# Altium PCB powermeter_Power.PcbDoc
Units mm, origin at the board's own origin, x right, y up, seen from the top; angles counter-clockwise.
Board outline 32.01 x 52.21 mm, 2 copper layers (Top Layer, Bottom Layer); 46 components, 25 nets, 122 pads, 25 vias.
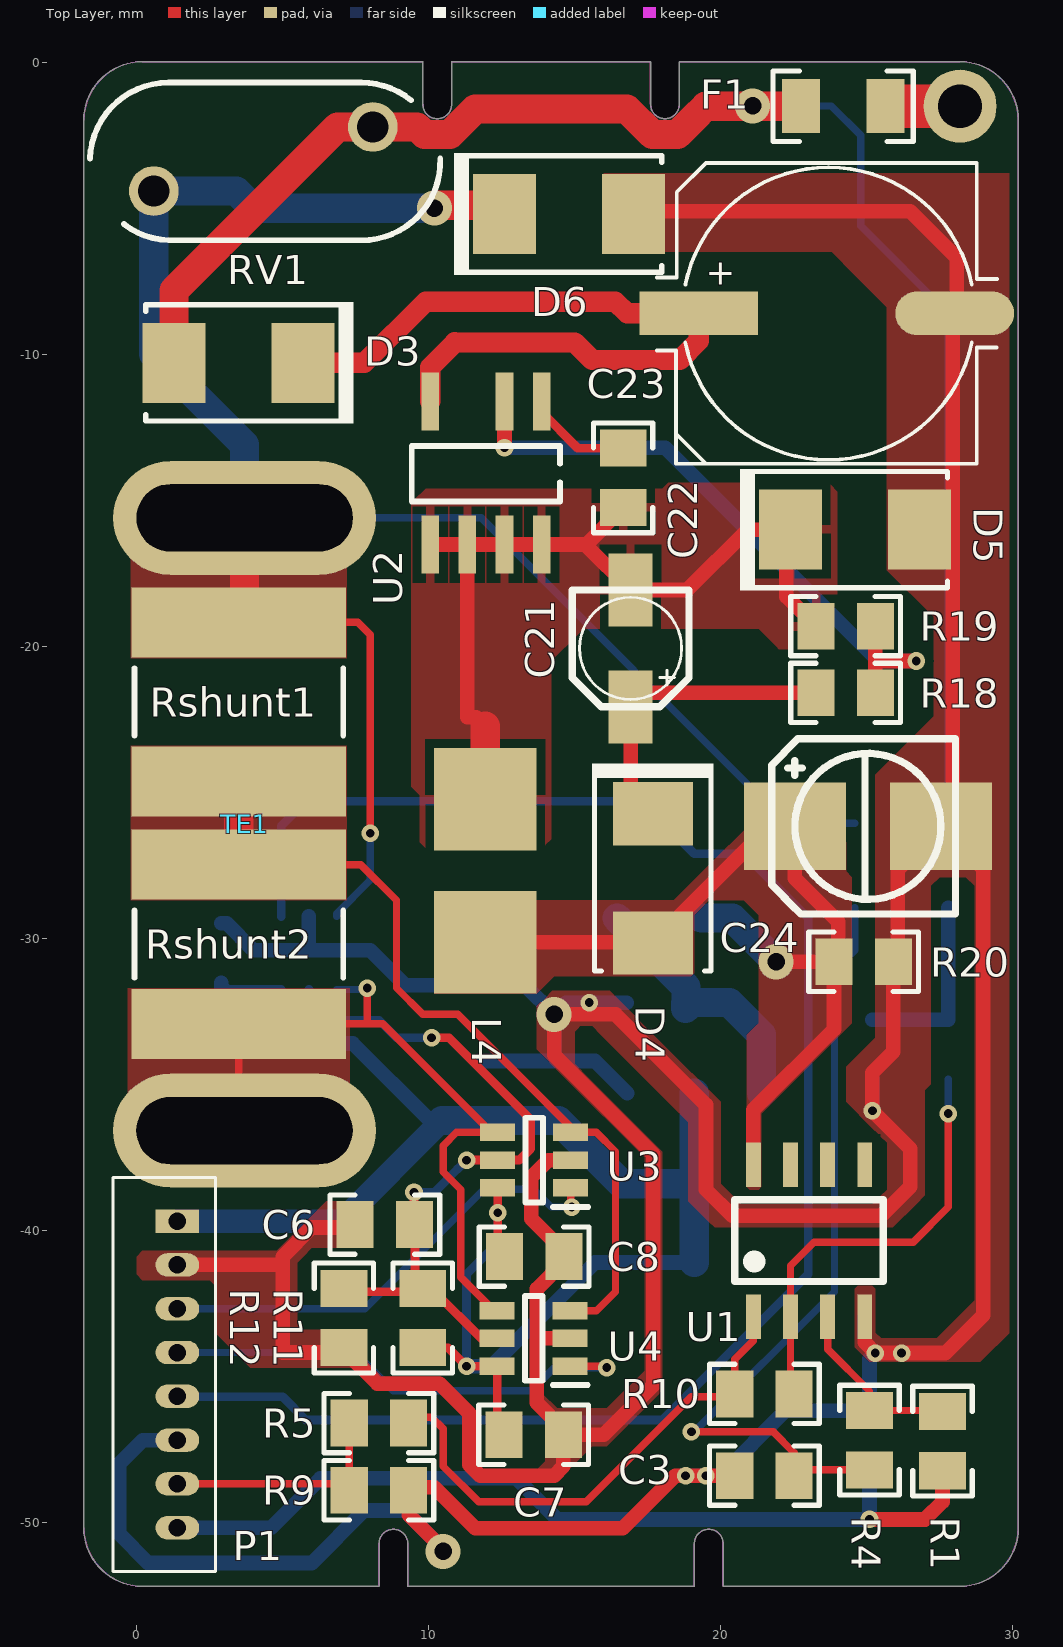
[diagram p0: Top Layer view]
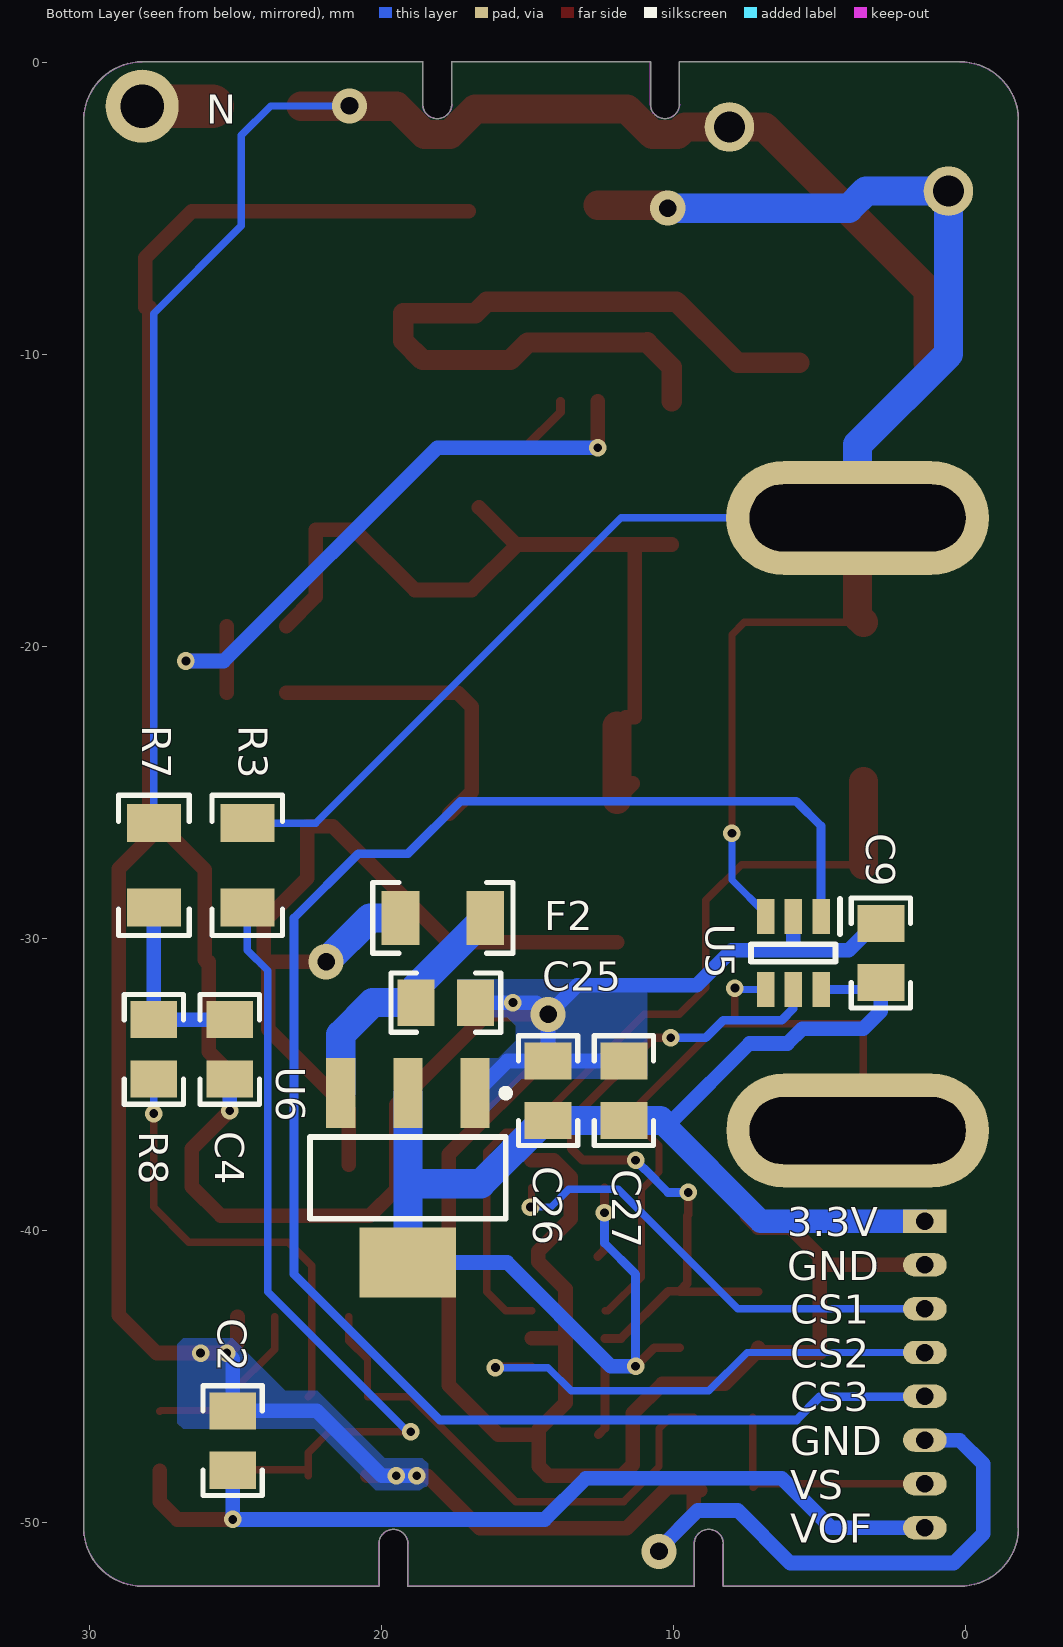
[diagram p1: Bottom Layer view, seen from below]

## Layer stack, top to bottom
Top Solder: solder mask 0.0102, Solder Resist, Dk 3.5
Top Layer: signal copper 0.0356
Dielectric 1: dielectric 0.32, FR-4, Dk 4.8
Bottom Layer: signal copper 0.0356
Bottom Solder: solder mask 0.0102, Solder Resist, Dk 3.5

## Board outline
0.196,-52.197 8.296,-52.197 ccw(c8.296,-52.19) 8.303,-52.19 8.303,-50.74 ccw(c8.296,-50.74) 8.303,-50.74 cw(c8.796,-50.74) 9.289,-50.74 9.289,-52.19 ccw(c9.296,-52.19) 9.296,-52.197 19.096,-52.197 ccw(c19.096,-52.19) 19.103,-52.19 19.103,-50.74 ccw(c19.096,-50.74) 19.103,-50.74 cw(c19.596,-50.74) 20.089,-50.74 20.089,-52.19 ccw(c20.096,-52.19) 20.096,-52.197 28.196,-52.197 ccw(c28.196,-50.19) 30.203,-50.19 30.203,-1.99 ccw(c28.196,-1.99) 28.196,0.016 18.596,0.016 ccw(c18.596,0.01) 18.589,0.01 18.589,-1.44 ccw(c18.596,-1.44) 18.589,-1.441 ccw(c18.096,-1.44) 18.589,-1.44 18.589,-1.441 cw(c18.096,-1.44) 17.603,-1.44 17.603,0.01 ccw(c17.596,0.01) 17.596,0.016 10.796,0.016 ccw(c10.796,0.01) 10.789,0.01 10.789,-1.44 ccw(c10.796,-1.44) 10.789,-1.441 ccw(c10.296,-1.44) 10.789,-1.44 10.789,-1.441 cw(c10.296,-1.44) 9.803,-1.44 9.803,0.01 ccw(c9.796,0.01) 9.796,0.016 0.196,0.016 ccw(c0.196,-1.99) -1.811,-1.99 -1.811,-50.19 ccw(c0.196,-50.19)

## Design rules (kind name [scope] priority, off if disabled: settings)
Clearance Clearance_1 [InNet('GND')] p1: gap=0.3
Clearance cutout [IsRegion] p2: gap=0.01
Clearance keepout [OnLayer('Keep-Out Layer')] p3: gap=0.01
Clearance [All] p4: gap=0.254
HoleSize [All] p1: absolutevalues=TRUE maxlimit=5 minlimit=0.01 maxpercent=80.000 minpercent=20.000
MinimumSolderMaskSliver [All] p1: minsoldermaskwidth=0.01
PolygonConnect [All] p1: connectstyle=Direct reliefconductorwidth=0.3 reliefentries=4 polygonreliefangle="90 Angle" airgapwidth=0.3
RoutingVias [All] p1: holewidth=0.3 width=0.6 viastyle="Through Hole" minholewidth=0.3 minwidth=0.6 maxholewidth=5 maxwidth=5
SilkToSilkClearance [All] p1: silktosilkclearance=0.1
SilkToSolderMaskClearance [IsPad] p1: minsilkscreentomaskgap=0.01 clearancetoexposedcopper=TRUE
SolderMaskExpansion [All] p1: expansion=0.102
Width [All] p1: maxlimit=5 minlimit=0.254 preferedwidth=0.254
26 further rules are at their usual default settings.

## Components (designator, comment, footprint, x,y, rotation, side; value= is the part's Value field where it differs from the comment)
C2 "104" 0805_HV 25.101,-47.208 r270 bottom
C3 "221" 0805_HV 21.501,-48.408 r0 top
C4 "221" 0805_HV 25.201,-33.808 r90 bottom
C6 "104" 0805_HV 8.501,-39.808 r0 top
C7 "104" 0805_HV 13.601,-47.008 r180 top
C8 "104" 0805_HV 13.617,-40.904 r180 top
C9 "104" 0805_HV 2.901,-30.508 r270 bottom
C21 "10uF" TU_NHOM_10uF_MH 16.919,-20.076 r0 top
C22 "104" 0805_HV 16.665,-14.234 r90 top
C23 "400AX6R8M8x11" PANACAP-G-GENERIC 23.7,-8.6 r0 top
C24 "220uF" TU_NHOM_2.5_MH 25.047,-26.172 r90 top
C25 "105" 0805_HV 17.801,-32.208 r0 bottom
C26 "105" 0805_HV 14.301,-35.224 r270 bottom
C27 "105" 0805_HV 11.701,-35.224 r270 bottom
D3 "US1M-13-F" SMB 3.49,-10.3 r0 top
D4 "US1M-13-F" SMB 17.681,-27.95 r90 top
D5 "US1M-13-F" SMB 24.601,-16.008 r180 top
D6 "US1M-13-F" SMB 14.81,-5.2 r180 top
F1 "Res" 1206 24.201,-1.508 r180 top
F2 "Res" 1206 17.901,-29.308 r180 bottom
L4 "680uF" "Inductor 4.5x5" 11.839,-27.442 r90 top
P1 "Header 8" CON6_1.5D 1.396,-39.691 r270 top locked
R1 "22K" 0805_HV 27.601,-47.224 r270 top
R3 "1.2M" 1206 24.601,-27.508 r270 bottom
R4 "2.2K" 0805_HV 25.101,-47.192 r270 top
R5 "10K" 0805_HV 8.301,-46.608 r0 top
R7 "1.2M" 1206 27.801,-27.508 r270 bottom
R8 "2.2K" 0805_HV 27.801,-33.808 r90 bottom
R9 "10K" 0805_HV 8.301,-48.908 r0 top
R10 "22K" 0805_HV 21.501,-45.608 r0 top
R11 "2K" 0805_HV 9.801,-43.008 r90 top
R12 "2K" 0805_HV 7.101,-43.008 r270 top
R18 "13k" 0805_HV 24.285,-21.6 r180 top
R19 "2K" 0805_HV 24.285,-19.314 r0 top
R20 "3k3" 0805_HV 24.901,-30.808 r180 top
Rshunt1 "0.006R" RESC2728 3.501,-21.908 r90 top
Rshunt2 "0.006R" RESC2728 3.501,-30.208 r90 top
RV1 "S10K275E2" VAR_S10K275E2 4.4,-3.4 r0 top
TE1 "Header 2" HDR1X2 2.801,-27.108 r90 top locked
U1 "LM358 SOP8_MH" "SOP 8" 23.031,-40.366 r0 top locked
U2 "LNK306" "SOP 7" 13.871,-11.62 r270 top
U3 "INA181A4IDBVT" SOT95P280X145-6N 13.617,-37.602 r180 top
U4 "INA181A1IDBVT" SOT95P280X145-6N 13.601,-43.708 r180 top
U5 "INA181A1IDBVT" SOT95P280X145-6N 5.901,-30.508 r270 bottom
U6 "AMS1117-3.3V SOT223 _MH" SOT223 19.101,-38.208 r0 bottom
Wp1 "Socket" PIN1 -51.696,-57.859 r0 top

## Footprints (in the part's own frame and the unit in brackets; to place one, negate y for a bottom-side part, rotate by r counter-clockwise, add the part's x,y. Pads: shape width x height; smd on the part's side, far side on the other; paste and mask are expansions set on the pad)
0805_HV [mil] "0805 with 30mil clearance between pads"
  rect 50x63 smd: 1(-40,0) 2(40,0)
  silkscreen extent -74,-40 74,40, body extent -43,-29 43,29, height 57
1206 [mm] "1206 from SM-752 data"
  rect 1.3x1.85 smd: 1(1.45,0) 2(-1.45,0)
  silkscreen extent -2.4,-1.21 2.4,1.21, body extent -1.7,-0.9 1.7,0.9, height 1.35
CON6_1.5D [mm]
  rect 0.8x1.5 hole 0.6 paste+0: 1(0,0)
  oval 0.8x1.5 hole 0.6 paste+0: 2(1.5,0) 3(3,0) 4(4.5,0) 5(6,0) 6(7.5,0) 7(9,0) 8(10.5,0)
  silkscreen extent -1.5,-2.2 12,1.3
HDR1X2 [mm] "Connector; Header; 2 Position"
  oval 3.9x9 hole 2.3 slot 7.4 at 90 deg: 1(-9.483,-0.895) 2(11.5,-0.9)
"Inductor 4.5x5" [mm]
  rect 3.5x3.5 smd: 1(2.2,-0.1) 2(-2.7,-0.1)
  body extent -2.6,-2.6 2.2,2.2, height 2
PANACAP-G-GENERIC [mil]
  rect 160x59.06 smd: 1(-175,0)
  oval 160x59.06 smd: 2(170,0)
  silkscreen extent -231,-203 227,203, body extent -233,-203 223,203, height 402
PIN1 [mm] "Connector; Plug"
RESC2728 [mm] "Chip Resistor, 2-Leads, Body 6.9x7.1mm, IPC Medium Density"
  rect 2.4x7.35 smd: 1(-2.725,0) 2(2.725,0)
  silkscreen extent -1.15,-3.58 1.15,3.57, body extent -3.55,-3.65 3.55,3.65, height 0.6
SMB [mm] "Molded Diode, 2-Leads, Body 5.4x3.6mm, IPC Medium Density, based on OnSemi component dimensions"
  rect 2.159x2.743 smd: 1(2.21,0) 2(-2.21,0)
  silkscreen extent -3.17,-2.08 3.94,2.08, body extent -2.7,-1.8 2.7,1.8, height 2.32
"SOP 7" [mm]
  rect 2x0.6 smd: 1(0,0) 2(0,-1.27) 4(0,-3.81) 5(4.9,-3.81) 6(4.9,-2.54) 7(4.9,-1.27) 8(4.9,0)
  silkscreen extent 1.52,-4.44 3.43,0.64, body extent -0.66,-4.38 5.39,0.52, height 1.36
"SOP 8" [mil]
  rect 20x60 smd: 1(-75,-102.5) 2(-25,-102.5) 3(25,-102.5) 4(75,-102.5) 5(75,102.5) 6(25,102.5) 7(-25,102.5) 8(-75,102.5)
  silkscreen extent -100,-55 100,55, body extent -98,-120 100,117, height 63
SOT95P280X145-6N [mm]
  rect 1.2x0.6 smd: 1(-1.25,0.95) 2(-1.25,0) 3(-1.25,-0.95) 4(1.25,-0.95) 5(1.25,0) 6(1.25,0.95)
  silkscreen extent -1.85,-1.45 0.3,1.6, body extent -1.4,-1.45 1.4,1.45, height 1.45
SOT223 [mm]
  rect 1x2.4 smd: 1(-2.3,-2.9) 2(0,-2.9) 3(2.3,-2.9)
  rect 3.3x2.4 smd: 4(0,2.9)
  silkscreen extent -3.47,-3.02 3.35,1.4, body extent -3.25,-3.56 3.25,3.4, height 1.68
TU_NHOM_2.5_MH [mm]
  rect 3x3.5 smd: 1(0,2.5) 2(0,-2.5)
  silkscreen extent -3,-3 3,3.3, body extent -3.3,-3.5 3.3,3.5, height 8.11
TU_NHOM_10uF_MH [mm]
  rect 1.5x2.5 smd: 1(0,-2) 2(0,2)
  silkscreen extent -2,-2 2,2, body extent -2.15,-2.5 2.15,2.5, height 5.4
VAR_S10K275E2 [mm] "EPCOS"
  round 1.7 hole 1.067: 1(-3.81,-1.016) 2(3.69,1.184)
  silkscreen extent -6,-2.7 6,2.7, body extent -6.02,-2.7 5.98,2.7, height 15

## Part data
C2 C3 C4 C6 C7 C8 C9 C22 C25 C26 C27: library part CM, "Cap SMD"
C21: library part TU_NHOM_10uF_25V_MH, "TU_NHOM_10uF_25V_MH"
C23: "CAP, AL, 6.8uF, 400V, +/-20%, TH"
C24: library part TU_NHOM_220uF_25V_MH, "TU_NHOM_220uF_25V_MH"
D3 D4 D5 D6: library part MURS160-13-F, "Diode, Ultrafast, 600V, 1A, SMB"
F1 F2: library part Res-SMD, "Resistor"
L4: library part "Inductor 4.5x5_MH"
P1: "Header, 8-Pin"
R1 R3 R4 R5 R7 R8 R9 R10 R11 R12 R18 R19 R20 Rshunt1 Rshunt2: library part R, "Resistor 1/4W"
RV1: "Varistor 275V RMS 10MM Radial, TH"
TE1: "Header, 2-Pin"
U2: library part Component_1
U3 U4 U5: library part INA181

## Free pads (board coordinates)
  round 2.5 hole 1.5 paste+0: 10(28.201,-1.508)

## Via types
v1: diameter 0.6, hole 0.3, Top Layer to Bottom Layer, tented both sides, 20 vias
v2: diameter 1.2, hole 0.6, Top Layer to Bottom Layer, tented both sides, 5 vias

## Nets (pads, with @x,y where several pads share a name; then routed paths per layer and width w, separated by ;. In a path a pad name is that pad's centre, name@x,y a point inside that pad or via, vN(x,y) a via of type N, cw(c..) or ccw(c..) an arc to the next point about the centre after c; other vN are vias at no path point)
3.3V: C7.2 C8.2 C9.2 C26.2 C27.2 P1.1 R11.1 U3.6 U4.6 U5.6 U6.2 U6.4 | length 60.7
  Top Layer w0.3: R11.1 10.667,-44.024 v1(11.301,-44.658) U4.6 12.351,-46.774 C7.2 ; U3.6 v1(12.367,-39.408) 12.367,-40.67 C8.2
  Bottom Layer w0.3: C9.2 3.135,-31.758 U5.6 ; v1(11.301,-44.658) 11.301,-41.508 12.367,-40.442 v1(12.367,-39.408)
  Bottom Layer w0.5: C9.2 2.901,-32.508 3.501,-33.108 5.601,-33.108 6.101,-33.608 7.401,-33.608 10.033,-36.24 10.469,-36.24 ; v1(11.301,-44.658) 12.151,-44.658 15.701,-41.108 U6.4
  Bottom Layer w0.8: P1.1 7.018,-39.691 10.469,-36.24
  Bottom Layer w1: 10.469,-36.24 C27.2 C26.2 14.44,-36.24 16.608,-38.408 19.101,-38.408 ; U6.4 19.101,-38.408 ; U6.2 19.101,-38.408
BP: C22.2 U2.1 | length 3.7
  Top Layer w0.3: U2.1 13.871,-11.978 15.111,-13.218 C22.2
CURRENT_SIGNAL1: P1.3 U3.1 | length 16.1
  Top Layer w0.254: U3.1 14.867,-39.174 v1(14.901,-39.208)
  Bottom Layer w0.254: P1.3 7.809,-42.691 11.9,-38.6 13.593,-38.6 14.201,-39.208 v1(14.901,-39.208)
CURRENT_SIGNAL2: P1.4 U4.1 | length 16.8
  Top Layer w0.254: U4.1 16.051,-44.658 v1(16.101,-44.708)
  Bottom Layer w0.254: P1.4 7.484,-44.191 8.793,-45.5 13.509,-45.5 14.301,-44.708 v1(16.101,-44.708)
CURRENT_SIGNAL3: P1.5 U5.1 | length 59.4
  Bottom Layer w0.3: P1.5 1.413,-45.708 5.001,-45.708 5.793,-46.5 18.009,-46.5 23.001,-41.508 23.001,-29.308 20.801,-27.108 19.101,-27.108 17.301,-25.308 5.801,-25.308 4.951,-26.158 U5.1
FB: R18.1 R19.2 U2.2 | length 22.4
  Top Layer w0.5: v1(12.601,-13.208) U2.2 ; R18.1 25.301,-20.457 ; R19.2 25.301,-20.457 ; v1(26.701,-20.508) 25.352,-20.508 25.301,-20.457
  Bottom Layer w0.5: v1(12.601,-13.208) 18.101,-13.208 25.401,-20.508 v1(26.701,-20.508)
GND: C2.1 C3.1 C4.1 C6.1 C7.1 C8.1 C9.1 C23.2 C24.2 C25.1 C26.1 C27.1 D5.2 D6.2 P1.2 P1.6 R9.2 R12.2 R20.1 U1.4 U3.2 U4.2 U5.2 U6.1 | length 207
  Top Layer w0.5: P1.2 4.984,-41.191 5.001,-41.208 ; R12.2 R12.2@7.101,-44.14 ; C6.1@7.501,-39.508 7.101,-39.908 6.001,-39.908 5.001,-40.908 5.001,-41.208 ; R9.2@9.092,-48.908 R9.2@9.301,-48.908 ; v2(10.5,-51) 10.5,-50.921 9.324,-49.745 9.317,-49.745 R9.2 R9.2@9.301,-48.908 ; U4.2 13.701,-43.708 ; U3.2 14.107,-37.602 13.517,-38.192 13.517,-39.607 14.633,-40.723 C8.1 14.633,-41.085 13.701,-42.017 13.701,-43.708 ; D6.2@17.01,-5.1 26.5,-5.1 28.095,-6.695 C23.2@28.095,-8.392 ; C3.1 v1(19.501,-48.408) v1(18.801,-48.408) 18.443,-48.408 16.643,-50.208 11.601,-50.208 10.201,-48.808 9.301,-48.808 R9.2@9.301,-48.908 ; U1.4 24.936,-43.843 v1(25.301,-44.208) v1(26.201,-44.208) 27.701,-44.208 29.001,-42.908 29.001,-27.626 C24.2 ; C23.2@27.951,-8.392 27.951,-25.768 C24.2 ; 5.001,-41.208 5.001,-44.191 7.05,-44.191 R12.2@7.101,-44.14 ; R12.2@7.101,-44.14 7.133,-44.14 8.251,-45.258 10.38,-45.258 11.4,-46.278 11.4,-48.036 11.772,-48.408 14.301,-48.408 14.617,-48.092 C7.1 ; 13.701,-43.708 13.701,-45.911 14.617,-46.827 C7.1 ; C7.1 16.001,-47.008 17.701,-45.308 17.701,-37.408 14.301,-34.008 v2(14.301,-32.608) 16.401,-32.608 19.501,-35.708 19.501,-38.608 20.401,-39.508 25.501,-39.508 26.501,-38.508 26.501,-37.208 v1(25.201,-35.908) 25.201,-34.608 25.917,-33.892 R20.1 25.999,-30.808 26.063,-30.744 26.063,-27.656 C24.2
  Bottom Layer w0.5: P1.6 0.209,-47.191 -0.6,-48 -0.6,-50.4 0.4,-51.4 6,-51.4 7.8,-49.6 9.179,-49.6 10.5,-50.921 v2(10.5,-51) ; C9.1 3.082,-29.492 3.998,-30.408 5.701,-30.408 ; U5.2 5.901,-30.208 5.701,-30.408 ; C27.1 C26.1 ; C25.1 v1(15.501,-32.208) 14.701,-32.208 v2(14.301,-32.608) ; U6.1 15.701,-34.208 C26.1 ; v1(18.801,-48.408) v1(19.501,-48.408) 20.001,-48.408 22.217,-46.192 C2.1 25.101,-44.408 v1(25.301,-44.208) ; v1(25.201,-35.908) C4.1 ; 5.701,-30.408 8.001,-30.408 9.201,-31.608 13.301,-31.608 v2(14.301,-32.608) ; C26.1 v2(14.301,-32.608)
L: D6.1 R3.2 Rshunt1.2 RV1.1 TE1.2 U5.3 | length 68.5
  Top Layer w0.254: Rshunt1.2 7.576,-19.183 8.001,-19.608 v1(8.001,-26.408)
  Top Layer w1: Rshunt1.2 3.701,-18.983 TE1.2 ; v2(10.2,-5) 10.3,-4.9 D6.1@12.59,-4.9
  Bottom Layer w0.254: TE1.2 11.801,-15.608 22.251,-26.058 R3.2 ; U5.3 6.851,-29.158 8.001,-28.008 v1(8.001,-26.408)
  Bottom Layer w1: TE1.2 3.701,-13.101 0.59,-9.99 RV1.1 3.416,-4.416 4,-5 v2(10.2,-5)
LOUT: Rshunt2.1 TE1.1 U3.4 U4.4 U5.4 | length 24.7
  Top Layer w0.254: TE1.1 3.501,-36.395 Rshunt2.1 7.901,-32.933 ; v1(7.901,-31.708) 7.901,-32.933 ; U4.4 12.251,-42.758 11.101,-41.608 11.101,-38.608 10.501,-38.008 10.501,-37.108 10.957,-36.652 U3.4@12.145,-36.652 ; U3.4 U3.4@12.145,-36.652 ; 7.901,-32.933 8.426,-32.933 U3.4@12.145,-36.652
  Bottom Layer w0.254: U5.4 v1@7.901,-31.758
LOUT1: Rshunt1.1 Rshunt2.2 U3.3 U4.3 | length 28.3
  Top Layer w0.254: Rshunt2.2 7.676,-27.483 8.901,-28.708 8.901,-31.708 9.801,-32.608 11.001,-32.608 14.867,-36.474 U3.3 15.745,-36.652 16.401,-37.308 16.401,-42.108 15.751,-42.758 U4.3
  Top Layer w1: Rshunt2.2 Rshunt1.1
N: F1.2 pad.10 | length 2.4
  Top Layer w1.5: F1.2@25.801,-1.508 pad.10
NetC3_2: C3.2 R3.1 R4.2 | length 27.5
  Top Layer w0.254: v1(19.001,-46.908) 21.801,-46.908 22.517,-47.624 C3.2@22.517,-48.208 ; C3.2 C3.2@22.517,-48.208 ; R4.2 C3.2@22.517,-48.208
  Bottom Layer w0.254: v1(19.001,-46.908) 19.101,-46.908 23.901,-42.108 23.901,-31.108 24.601,-30.408 R3.1
NetC4_2: C4.2 R7.1 R8.2 | length 6.4
  Bottom Layer w0.5: C4.2 R8.2 R7.1
NetC21_1: C21.1 D4.1 R18.2 | length 10.5
  Top Layer w0.5: D4.1 16.919,-24.978 C21.1 17.395,-21.6 R18.2
NetC25_2: C25.2 F2.1 U6.3 | length 9.2
  Bottom Layer w1: F2.1 18.817,-31.673 C25.2 18.801,-32.224 18.801,-32.408 19.001,-32.208 20.301,-32.208 21.401,-33.308 U6.3
NetR1_1: R1.1 R4.1 U1.3 | length 6.3
  Top Layer w0.254: U1.3 23.666,-44.073 25.101,-45.508 R4.1 27.569,-46.176 R1.1
NetR8_1: R8.1 R10.2 U1.2 | length 15.2
  Top Layer w0.254: R10.2@22.517,-45.708 22.396,-45.587 U1.2 22.396,-41.213 23.201,-40.408 26.601,-40.408 27.801,-39.208 v1(27.801,-36.008)
  Bottom Layer w0.254: v1(27.801,-36.008) R8.1
NN: D3.2 F1.1 R7.2 RV1.2 | length 56.4
  Top Layer w1: D3.2 1.28,-7.82 6.884,-2.216 RV1.2 9.606,-2.216 9.867,-2.477 10.725,-2.477 11.253,-1.948 11.253,-1.947 11.6,-1.6 16.79,-1.6 17.667,-2.477 18.525,-2.477 19.053,-1.948 19.053,-1.947 19.492,-1.508 F1.1
  Bottom Layer w0.254: v2(21.1,-1.5) 23.793,-1.5 24.801,-2.508 24.801,-5.608 27.801,-8.608 R7.2
S: C21.2 C22.1 D5.1 L4.1 R19.1 U2.5 U2.6 U2.7 U2.8 | length 29.2
  Top Layer w0.5: U2.5 U2.6 ; L4.1@11.401,-24.704 L4.1 ; 11.939,-22.746 11.631,-22.438 11.331,-22.438 U2.6 ; C22.1 15.395,-16.52 15.363,-16.52 ; R19.1 22.253,-18.298 22.253,-16.012 20.93,-16.012 18.866,-18.076 C21.2 15.363,-16.52 ; U2.6 U2.7 U2.8 15.363,-16.52
  Top Layer w1: L4.1 11.939,-22.746
V1: R5.2 R10.1 U1.1 | length 17.6
  Top Layer w0.254: R5.2@9.317,-46.408 10.101,-46.408 10.501,-46.808 10.501,-48.094 11.714,-49.308 15.401,-49.308 19.001,-45.708 20.485,-45.708 R10.1 20.485,-44.424 21.126,-43.783 U1.1
VCC_RELAY: C24.1 D4.2 F2.2 L4.2 R20.2 U1.8 | length 30.8
  Top Layer w0.5: L4.2 17.663,-30.142 D4.2 21.669,-26.172 C24.1 22.547,-27.954 24.031,-29.438 R20.2@24.031,-30.808 ; U1.8 21.126,-35.883 23.885,-33.124 R20.2 v2(21.901,-30.808)
  Bottom Layer w1: F2.2 20.401,-29.308 v2(21.901,-30.808)
VIN1: C23.1 D3.1 U2.4 | length 26.8
  Top Layer w0.7: D3.1 7.8,-10.3 9.9,-8.2 16.4,-8.2 16.8,-8.6 C23.1 19.255,-9.545 18.6,-10.2 15.6,-10.2 15,-9.6 10.902,-9.6 ; U2.4 10.061,-10.448 10.901,-9.608 10.901,-9.599
VOFFSET_VOL: C2.2 P1.8 R1.2 | length 30.8
  Top Layer w0.5: v1(25.101,-49.908) 27.001,-49.908 27.601,-49.308 R1.2
  Bottom Layer w0.5: P1.8 4.609,-50.191 6.3,-48.5 13,-48.5 14.408,-49.908 v1(25.101,-49.908) C2.2 C2.2@24.785,-48.224
VOL_SIGNAL: P1.7 R5.1 R9.1 | length 8.3
  Top Layer w0.254: P1.7 R9.1@7.152,-48.691 ; R9.1@7.269,-48.808 R9.1@7.152,-48.691 ; R5.1@7.285,-46.408 R5.1 7.285,-48.558 R9.1@7.152,-48.691
VREF: C6.2 R11.2 R12.1 U3.5 U4.5 U5.5 | length 24.9
  Top Layer w0.3: R12.1@7.101,-42.108 9.785,-42.108 R11.2@9.801,-42.092 ; v1(9.501,-38.708) 9.501,-39.476 9.533,-39.508 9.533,-41.824 R11.2@9.801,-42.092 ; v1(10.101,-33.408) 10.701,-33.408 13.501,-36.208 13.501,-37.208 13.107,-37.602 U3.5 11.307,-37.602 v1(11.301,-37.608) ; U4.5 11.801,-43.708 10.185,-42.092 R11.2@9.801,-42.092
  Bottom Layer w0.3: U5.5 5.901,-32.408 6.301,-32.808 8.301,-32.808 8.901,-33.408 v1(10.101,-33.408) ; v1(9.501,-38.708) 10.192,-38.708 10.992,-37.908 11.001,-37.908 v1(11.301,-37.608)
pads on no net: U1.5 U1.6 U1.7

## Polygon pours and split planes (outlines as drawn)
GND on Top Layer "Bottom Layer-No Net" (solid, pour order 12): 16,-3.8 30.196,-3.8 30.196,-27.8 29.2,-27.8 28.2,-26.8 25.9,-26.8 25.801,-26.701 25.801,-23.908 27.3,-22.409 27.3,-19.8 27.3,-19 25.7,-17.4 25.7,-13.6 25.7,-8.4 24.6,-7.3 23.8,-6.5 17.6,-6.5 16,-6.5
L on Top Layer "Bottom Layer-No Net 1" (solid, pour order 20): -0.199,-20.408 -0.199,-14.608 0.201,-14.208 0.301,-14.108 5.201,-14.108 6.601,-14.108 7.101,-14.608 7.201,-14.708 7.201,-18.808 7.201,-20.408
LOUT1 on Top Layer "Bottom Layer-No Net 1" (solid, pour order 18): -0.199,-23.408 -0.199,-28.708 7.201,-28.708 7.201,-23.408
LOUT on Top Layer "Bottom Layer-No Net 1" (solid, pour order 15): 7.201,-31.708 -0.299,-31.708 -0.299,-37.308 0.201,-37.808 0.601,-38.208 5.701,-38.208 6.601,-38.208 7.401,-37.408 7.301,-37.308 7.301,-33.508 7.301,-31.708
S on Top Layer "Bottom Layer-No Net" (solid, pour order 11): 17.601,-14.608 13.601,-14.608 9.901,-14.608 9.501,-15.008 9.401,-15.108 9.401,-21.708 9.401,-24.808 9.701,-25.108 9.701,-26.608 9.701,-26.708 10.101,-27.108 13.601,-27.108 13.701,-27.108 14.001,-26.808 14.201,-26.608 14.201,-23.508 14.201,-20.508 15.101,-19.608 15.301,-19.408 16.801,-19.408 21.301,-19.408 21.901,-20.008 22.001,-20.108 23.101,-20.108 23.901,-20.108 24.001,-20.008 24.001,-19.508 24.001,-14.708 23.701,-14.408 22.401,-14.408 18.201,-14.408 18.001,-14.608
VCC_RELAY on Top Layer "Bottom Layer-No Net" (solid, pour order 13): 10.201,-28.708 18.401,-28.708 19.601,-27.508 21.001,-26.108 23.801,-26.108 23.801,-26.208 24.301,-26.708 24.301,-27.608 24.301,-27.708 24.501,-27.908 24.501,-30.508 24.501,-32.908 23.001,-34.408 21.401,-36.008 21.401,-38.108 21.401,-38.508 21.301,-38.608 21.001,-38.608 20.901,-38.508 20.901,-36.808 20.901,-33.308 21.201,-33.008 21.301,-32.908 21.301,-30.808 21.301,-29.208 20.801,-28.708 20.201,-28.708 19.601,-28.708 19.301,-29.008 19.101,-29.208 19.101,-30.408 19.101,-31.208 19.001,-31.308 18.401,-31.308 14.301,-31.308 13.701,-31.908 10.201,-31.908
GND on Top Layer "Bottom Layer-No Net" (solid, pour order 14): 25.801,-23.908 25.301,-24.408 25.301,-30.308 25.301,-33.408 24.701,-34.008 24.301,-34.408 24.301,-35.308 24.301,-35.608 25.201,-36.508 25.701,-37.008 25.701,-38.308 25.701,-38.608 25.401,-38.908 25.201,-39.108 23.201,-39.108 20.701,-39.108 20.101,-38.508 20.001,-38.408 20.001,-36.208 20.001,-35.608 18.001,-33.608 16.201,-31.808 14.901,-31.808 14.201,-31.808 14.001,-32.008 13.701,-32.308 13.701,-32.908 13.701,-33.808 14.601,-34.708 17.401,-37.508 17.401,-39.308 17.401,-44.808 16.101,-46.108 15.201,-46.108 14.401,-46.108 13.901,-45.608 13.901,-42.108 13.501,-42.108 13.501,-46.008 14.001,-46.508 14.001,-47.908 13.701,-48.208 12.201,-48.208 11.901,-48.208 11.601,-47.908 11.601,-46.408 11.601,-46.208 10.401,-45.008 8.901,-45.008 8.401,-45.008 7.601,-44.208 6.801,-43.408 5.801,-43.408 5.701,-43.408 5.501,-43.208 5.501,-41.608 5.501,-41.108 5.701,-40.908 6.001,-40.608 7.201,-40.608 7.901,-40.608 8.001,-40.508 8.001,-39.608 8.001,-39.508 7.701,-39.208 7.501,-39.008 6.801,-39.008 6.501,-39.008 6.001,-39.508 4.801,-40.708 1.901,-40.708 0.201,-40.708 0.001,-40.908 0.001,-41.208 0.001,-41.508 0.201,-41.708 2.501,-41.708 2.701,-41.908 2.701,-42.308 2.701,-43.508 3.901,-44.708 7.401,-44.708 8.001,-45.308 9.601,-45.308 10.101,-45.308 10.701,-45.908 11.201,-46.408 11.201,-47.108 11.201,-47.908 11.901,-48.608 14.201,-48.608 14.401,-48.608 14.801,-48.208 15.601,-47.408 16.101,-47.408 17.701,-45.808 18.001,-45.508 18.001,-40.408 18.001,-37.308 15.501,-34.808 15.001,-34.308 15.001,-33.208 15.101,-33.108 15.201,-33.008 15.501,-33.008 15.601,-33.008 15.901,-33.308 18.901,-36.308 18.901,-38.008 18.901,-39.008 19.601,-39.708 19.801,-39.908 24.201,-39.908 25.901,-39.908 26.701,-39.108 27.001,-38.808 27.001,-37.308 27.001,-27.608 28.101,-26.508
GND on Top Layer "Bottom Layer-No Net" (solid, pour order 16): 29.884,-27.508 29.884,-43.525 29.001,-44.408 28.901,-44.508 25.701,-44.508 25.101,-44.508 24.601,-44.008 24.601,-42.208 24.601,-42.008 24.701,-41.908 25.101,-41.908 25.201,-41.908 25.301,-42.008 25.301,-42.408 25.301,-43.508 25.501,-43.708 26.901,-43.708 27.401,-43.708 28.301,-42.808 28.701,-42.408 28.701,-40.908 28.701,-28.208 28.401,-27.908 27.801,-27.908 27.501,-27.908 27.201,-28.208 27.201,-30.508 27.201,-35.008 26.801,-35.408 26.701,-35.508 26.301,-35.508 26.301,-27.408
GND on Bottom Layer "Bottom Layer-No Net" (solid, pour order 17): 26.801,-43.708 25.301,-43.708 25.101,-43.708 24.901,-43.908 23.301,-45.508 22.401,-45.508 22.201,-45.508 21.201,-46.508 19.901,-47.808 18.701,-47.808 18.601,-47.808 18.401,-48.008 18.401,-48.208 18.401,-48.708 18.501,-48.808 18.601,-48.908 19.001,-48.908 20.201,-48.908 21.301,-47.808 22.301,-46.808 23.901,-46.808 26.801,-46.808 27.001,-46.608 27.001,-46.208 27.001,-43.908 26.801,-43.708
GND on Bottom Layer "Bottom Layer-No Net" (solid, pour order 19): 17.401,-31.408 12.801,-31.408 11.301,-31.408 10.901,-31.808 10.901,-34.108 10.901,-34.708 11.001,-34.808 14.201,-34.808 15.101,-34.808 15.201,-34.808 15.501,-35.108 16.401,-36.008 17.001,-36.008 17.001,-34.508 16.601,-34.108 16.301,-34.108 16.001,-34.108 15.401,-33.508 15.401,-33.108 15.401,-33.008 15.601,-32.808 15.701,-32.708 16.801,-32.708 17.401,-32.708

## Keep-outs
Keep-Out Layer:
  lines w0.013: -1.804,-50.19 ccw(c0.196,-50.19) 0.196,-52.19 8.296,-52.19 8.296,-50.74 cw(c8.796,-50.74) 9.296,-50.74 9.296,-52.19 19.096,-52.19 19.096,-50.74 cw(c19.596,-50.74) 20.096,-50.74 20.096,-52.19 28.196,-52.19 ccw(c28.196,-50.19) 30.196,-50.19 30.196,-1.99 ccw(c28.196,-1.99) 28.196,0.01 18.596,0.01 18.596,-1.44 cw(c18.096,-1.44) 17.596,-1.44 17.596,0.01 10.796,0.01 10.796,-1.44 cw(c10.296,-1.44) 9.796,-1.44 9.796,0.01 0.196,0.01 ccw(c0.196,-1.99) -1.804,-1.99 -1.804,-50.19

## Silkscreen, mask and mechanical layers (free items; w line width, h text height)
Bottom Overlay:
  text "N" at 26.001,-2.108 h1
  text "3.3V" at 6.101,-40.208 h1
  text "GND" at 6.101,-41.708 h1
  text "CS1" at 6.001,-43.208 h1
  text "CS2" at 6.001,-44.708 h1
  text "CS3" at 6.001,-46.208 h1
  text "GND" at 6.001,-47.708 h1
  text "VS" at 6.001,-49.208 h1
  text "VOF" at 6.001,-50.708 h1
Mechanical 2:
  circle w0.013: c1.396,-48.69 r0.35
  circle w0.013: c1.396,-45.69 r0.35
  circle w0.013: c1.396,-42.69 r0.35
  circle w0.013: c1.396,-39.69 r0.35
  circle w0.013: c1.396,-41.19 r0.35
  circle w0.013: c1.396,-44.19 r0.35
  circle w0.013: c1.396,-47.19 r0.35
  circle w0.013: c1.396,-50.19 r0.35
  circle w0.013: c1.396,-48.691 r0.35
  circle w0.013: c1.396,-45.691 r0.35
  circle w0.013: c1.396,-42.691 r0.35
  circle w0.013: c1.396,-39.691 r0.35
  circle w0.013: c1.396,-41.191 r0.35
  circle w0.013: c1.396,-44.191 r0.35
  circle w0.013: c1.396,-47.191 r0.35
  circle w0.013: c1.396,-50.191 r0.35
  lines w0.013: 0.496,-37.19 ccw(c0.996,-37.19) 0.996,-37.69 ; 0.496,-37.19 ccw(c0.996,-37.19) 0.996,-37.69 ; 0.496,-37.19 0.496,-35.99 ; 0.496,-37.19 0.496,-35.99 ; 0.496,-35.99 cw(c0.996,-35.99) 0.996,-35.49 ; 0.496,-35.99 cw(c0.996,-35.99) 0.996,-35.49 ; 0.496,-16.19 ccw(c0.996,-16.19) 0.996,-16.69 ; 0.496,-16.19 ccw(c0.996,-16.19) 0.996,-16.69 ; 0.496,-16.19 0.496,-14.99 ; 0.496,-16.19 0.496,-14.99 ; 0.496,-14.99 cw(c0.996,-14.99) 0.996,-14.49 ; 0.496,-14.99 cw(c0.996,-14.99) 0.996,-14.49 ; 0.996,-37.691 cw(c0.996,-37.191) 0.496,-37.191 0.496,-35.991 cw(c0.996,-35.991) 0.996,-35.491 6.396,-35.491 cw(c6.396,-35.991) 6.896,-35.991 ; 0.996,-37.69 6.396,-37.69 ; 0.996,-37.691 6.396,-37.691 ; 0.996,-37.69 6.396,-37.69 ; 0.996,-35.49 6.396,-35.49 ; 0.996,-35.49 6.396,-35.49 ; 0.996,-16.69 6.396,-16.69 ; 0.996,-16.69 6.396,-16.69 ; 0.996,-14.491 ccw(c0.996,-14.991) 0.496,-14.991 0.496,-16.191 ccw(c0.996,-16.191) 0.996,-16.691 6.396,-16.691 ccw(c6.396,-16.191) 6.896,-16.191 6.896,-14.991 ; 0.996,-14.49 6.396,-14.49 ; 0.996,-14.491 6.396,-14.491 ; 0.996,-14.49 6.396,-14.49 ; 6.396,-37.69 ccw(c6.396,-37.19) 6.896,-37.19 ; 6.396,-37.691 ccw(c6.396,-37.191) 6.896,-37.191 ; 6.396,-37.69 ccw(c6.396,-37.19) 6.896,-37.19 ; 6.396,-35.49 cw(c6.396,-35.99) 6.896,-35.99 ; 6.396,-35.49 cw(c6.396,-35.99) 6.896,-35.99 ; 6.396,-16.69 ccw(c6.396,-16.19) 6.896,-16.19 ; 6.396,-16.69 ccw(c6.396,-16.19) 6.896,-16.19 ; 6.396,-14.49 cw(c6.396,-14.99) 6.896,-14.99 ; 6.396,-14.491 cw(c6.396,-14.991) 6.896,-14.991 ; 6.396,-14.49 cw(c6.396,-14.99) 6.896,-14.99 ; 6.896,-37.19 6.896,-35.99 ; 6.896,-37.191 6.896,-35.991 ; 6.896,-37.19 6.896,-35.99 ; 6.896,-16.19 6.896,-14.99 ; 6.896,-16.19 6.896,-14.99 ; -1.804,-50.191 ccw(c0.196,-50.191) 0.196,-52.191 9.796,-52.191 9.796,-50.741 cw(c10.296,-50.741) 10.796,-50.741 10.796,-52.191 17.596,-52.191 17.596,-50.741 cw(c18.096,-50.741) 18.596,-50.741 18.596,-52.191 28.196,-52.191 ccw(c28.196,-50.191) 30.196,-50.191 30.196,-1.991 ccw(c28.196,-1.991) 28.196,0.009 20.096,0.009 20.096,-1.441 cw(c19.596,-1.441) 19.096,-1.441 19.096,0.009 9.296,0.009 9.296,-1.441 cw(c8.796,-1.441) 8.296,-1.441 8.296,0.009 0.196,0.009 ccw(c0.196,-1.991) -1.804,-1.991 -1.804,-50.191 ; -0.804,-51.691 -0.804,-38.191 2.696,-38.191 2.696,-51.691 -0.804,-51.691 ; -0.804,-51.69 -0.804,-38.19 2.696,-38.19 2.696,-51.69 -0.804,-51.69
  lines w0.1: 3.696,-37.69 3.696,-35.491 ; 3.696,-16.69 3.696,-14.513 3.701,-14.508 ; 3.696,-35.491 3.696,-35.491

## Text inside footprints (layer, text, board x,y; h text height)
C23: Top Overlay "+" at 19.5,-7.625 h0.89